# Altium PCB PCB_Project_SFS_Button.PcbDoc
Units mm, origin at the board's own origin, x right, y up, seen from the top; angles counter-clockwise.
Board outline 13.5 x 13.5 mm, 4 copper layers (Top Layer, Ground Plane, Power Plane, Bottom Layer), stack 0.761 mm thick; 5 components, 3 nets, 16 pads, 11 vias.
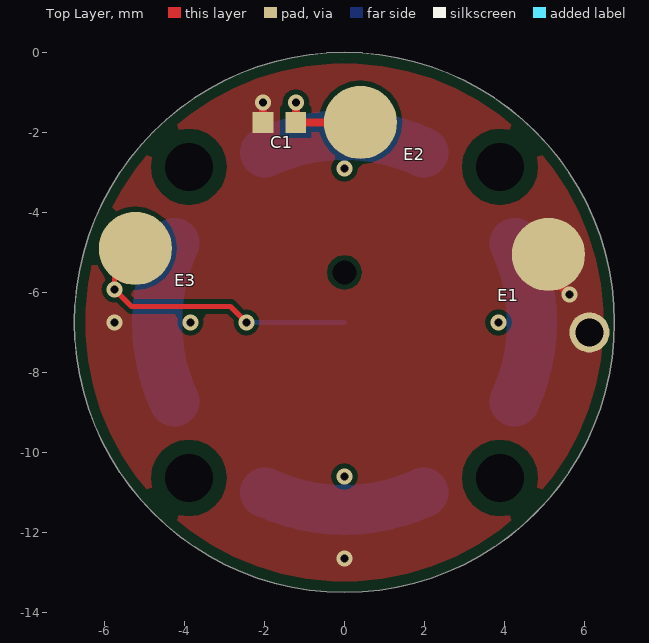
[diagram p0: Top Layer view]
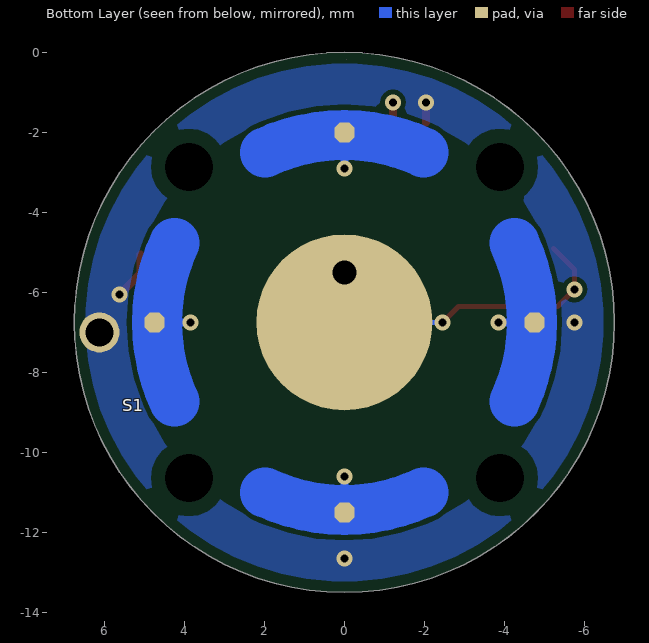
[diagram p1: Bottom Layer view, seen from below]
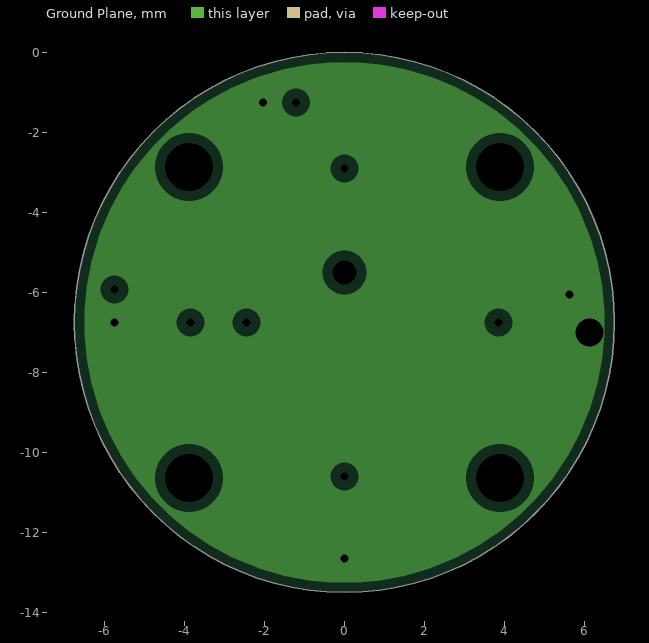
[diagram p2: Ground Plane, clearances drawn from the general rule]
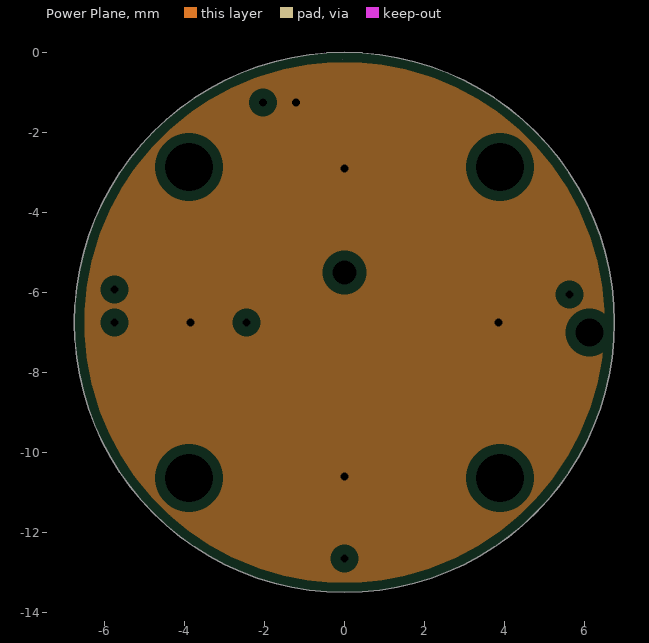
[diagram p3: Power Plane, clearances drawn from the general rule]

## Layer stack, top to bottom
Top Solder: solder mask 0.033, Solder Resist, Dk 3.5
Top Layer: signal copper 0.0411
Dielectric 1: prepreg 0.1295, Prepreg 2116, Dk 4.2
Ground Plane: plane copper 0.035, net GND
Dielectric 3: core 0.35, Core FR4, Dk 4.2
Power Plane: plane copper 0.035, net VBATT
Dielectric 2: prepreg 0.1295, Prepreg 2116, Dk 4.2
Bottom Layer: signal copper 0.0411
Bottom Solder: solder mask 0.033, Solder Resist, Dk 3.5

## Board outline
-6.75,-6.75 ccw(c0,-6.75) 0,-13.5 ccw(c0,-6.75) 6.75,-6.75 ccw(c0,-6.75) 0,0 ccw(c0,-6.75)
cut-out: -0.5,0
cut-out: -0.05,-0.175

## Design rules (kind name [scope] priority, off if disabled: settings)
BoardOutlineClearance [All] p1: gap=0.25 ignorepadtopadclearanceinfootprint=FALSE except(0: Arc-SplitContinuation Track-SplitContinuation SMDPad-SplitContinuation THPad-SplitContinuation Via-SplitContinuation Fill-SplitContinuation Poly-SplitContinuation Region-SplitContinuation Text-SplitContinuation)
Clearance NPTHClearance [IsThruPin and not PadIsPlated] p1: gap=0.35 ignorepadtopadclearanceinfootprint=FALSE except(0: Arc-Hole Track-Hole SMDPad-Hole THPad-Hole Via-Hole Fill-Hole Poly-Hole Region-Hole Text-Hole)
Clearance LowClearance [All] p2 off: gap=0.1 ignorepadtopadclearanceinfootprint=FALSE except(0: Arc-Hole Track-Hole SMDPad-Hole THPad-Hole Via-Hole Fill-Hole Poly-Hole Region-Hole Text-Hole)
Clearance StandardClearance [All] p3: gap=0.125 ignorepadtopadclearanceinfootprint=FALSE except(0: Arc-Hole Track-Hole SMDPad-Hole THPad-Hole Via-Hole Fill-Hole Poly-Hole Region-Hole Text-Hole)
Clearance HighClearance [All] p4 off: gap=0.25 ignorepadtopadclearanceinfootprint=FALSE except(0: Arc-Hole Track-Hole SMDPad-Hole THPad-Hole Via-Hole Fill-Hole Poly-Hole Region-Hole Text-Hole)
ComponentClearance [All] p1: gap=0 collisioncheckmode=3 verticalgap=2540 showdistances=FALSE
DiffPairsRouting [All] p1: maxlimit=1 minlimit=0.1 mostfreqgap=0.125 toplayer_minwidth=0.1 toplayer_maxwidth=1 toplayer_prefwidth=0.125 bottomlayer_minwidth=0.1 bottomlayer_maxwidth=1 bottomlayer_prefwidth=0.125 maxuncoupledlength=12.7
HoleSize HoleSize-0.8mmBoard [All] p1 off: absolutevalues=TRUE maxlimit=10 minlimit=0.15 maxpercent=80.000 minpercent=20.000 // For Board Thickness <= 0.8mm, Aspect Ratio <= 6
HoleSize HoleSize-LaserDrill [All] p2 off: absolutevalues=TRUE maxlimit=10 minlimit=0.15 maxpercent=80.000 minpercent=20.000 // Minimum Hole Size for Laser Drill
HoleSize HoleSize-ConventionalDrill [All] p3: absolutevalues=TRUE maxlimit=10 minlimit=0.175 maxpercent=80.000 minpercent=20.000 // Minimum Hole Size for Conventional Drill
HoleSize HoleSize-1.5mmBoard [All] p4: absolutevalues=TRUE maxlimit=10 minlimit=0.25 maxpercent=80.000 minpercent=20.000 // For Board Thickness <= 1.5mm, Aspect Ratio <= 6
HoleToHoleClearance [All] p1: gap=0.25 allowstackedmicrovias=TRUE
MinimumAnnularRing [All] p1: minimumring=0.1
MinimumSolderMaskSliver [All] p1: minsoldermaskwidth=0.2
PlaneClearance [All] p1: clearance=0.25
PlaneConnect [All] p1: planeconnectstyle=Direct reliefexpansion=0.508 reliefentries=4 reliefconductorwidth=0.254 reliefairgap=0.254
PolygonConnect [All] p1: connectstyle=Direct reliefconductorwidth=0.254 reliefentries=4 polygonreliefangle="90 Angle" airgapwidth=0.254
RoomDefinition IDF_Placement_Keepout_1 [All vs False] p1: confinementstyle=ConfineOut formatcopy=TRUE lockcomponents=FALSE outline 3.6,-8.936 4.639,-9.975 4.673,-9.925 4.74,-9.825 4.804,-9.723 4.867,-9.62 4.897,-9.568 6.335,-10.575 6.219,-10.767 5.964,-11.136 5.688,-11.489 5.391,-11.824 5.074,-12.141 4.739,-12.438 4.386,-12.714 4.017,-12.969 3.825,-13.085 2.818,-11.647 2.87,-11.617 2.973,-11.554 3.075,-11.49 3.175,-11.423 3.225,-11.389 2.186,-10.35 0.005,-10.35 0.005,-8.85 2.1,-8.85 2.1,-4.65 0.005,-4.65 0.005,-3.15 2.186,-3.15 3.225,-2.111 3.175,-2.077 3.075,-2.01 2.974,-1.946 2.87,-1.883 2.818,-1.853 3.825,-0.415 4.017,-0.531 4.386,-0.786 4.739,-1.062 5.074,-1.359 5.391,-1.676 5.688,-2.011 5.964,-2.364 6.219,-2.733 6.335,-2.925 4.897,-3.932 4.867,-3.88 4.804,-3.777 4.74,-3.675 4.673,-3.575 4.639,-3.525 3.6,-4.564
RoomDefinition IDF_Placement_Keepout [All vs False] p2: confinementstyle=ConfineOut formatcopy=TRUE lockcomponents=FALSE outline -3.6,-8.936 -3.6,-4.564 -4.639,-3.525 -4.673,-3.575 -4.74,-3.675 -4.804,-3.777 -4.867,-3.88 -4.897,-3.932 -6.335,-2.925 -6.219,-2.733 -5.964,-2.364 -5.688,-2.011 -5.391,-1.676 -5.074,-1.359 -4.739,-1.062 -4.386,-0.786 -4.017,-0.531 -3.825,-0.415 -2.818,-1.853 -2.87,-1.883 -2.973,-1.946 -3.075,-2.01 -3.175,-2.077 -3.225,-2.111 -2.186,-3.15 -0.005,-3.15 -0.005,-4.65 -2.1,-4.65 -2.1,-8.85 -0.005,-8.85 -0.005,-10.35 -2.186,-10.35 -3.225,-11.389 -3.175,-11.423 -3.075,-11.49 -2.973,-11.554 -2.87,-11.617 -2.818,-11.647 -3.825,-13.085 -4.017,-12.969 -4.386,-12.714 -4.739,-12.438 -5.074,-12.141 -5.391,-11.824 -5.688,-11.489 -5.964,-11.136 -6.219,-10.767 -6.335,-10.575 -4.897,-9.568 -4.867,-9.62 -4.804,-9.723 -4.74,-9.825 -4.673,-9.925 -4.639,-9.975
RoutingVias [All] p1: holewidth=0.711 width=1.27 viastyle="Through Hole" minholewidth=0.711 minwidth=1.27 maxholewidth=0.711 maxwidth=1.27
SilkToSilkClearance [All] p1: silktosilkclearance=0.1
SilkToSolderMaskClearance [IsPad] p1: minsilkscreentomaskgap=0.3 clearancetoexposedcopper=TRUE
SolderMaskExpansion [All] p1: expansion=0.1
Width [All] p1: maxlimit=10 minlimit=0.1 preferedwidth=0.125 minimp=50.000000 maximp=50.000000 favimp=50.000000 checkconnectedcopper=TRUE
21 further rules are at their usual default settings.

## Classes and differential pairs
net class Power: GND VBATT

## Components (designator, comment, footprint, x,y, rotation, side; value= is the part's Value field where it differs from the comment)
C1 "" C-IPCG-0402-H -1.625,-1.75 r0 top value=10µF
E1 "Mill-Max 806-22-001-30-0XX191" POGO-1_83MMDIA-SMD 5.1,-5.05 r0 top locked
E2 "Mill-Max 806-22-001-30-0XX191" POGO-1_83MMDIA-SMD 0.4,-1.75 r0 top locked
E3 "Mill-Max 806-22-001-30-0XX191" POGO-1_83MMDIA-SMD -5.225,-4.9 r0 top
S1 "900 gF V2" DOME_10MM_Actual4LEG 0,-6.75 r180 bottom

## Footprints (in the part's own frame and the unit in brackets; to place one, negate y for a bottom-side part, rotate by r counter-clockwise, add the part's x,y. Pads: shape width x height; smd on the part's side, far side on the other; paste and mask are expansions set on the pad)
C-IPCG-0402-H [mm] "Chip Capacitor, 2-Leads, Body 1.00x0.50mm, IPC High Density"
  rect 0.52x0.52 smd: 1(-0.41,0) 2(0.41,0)
  body extent -0.53,-0.28 0.53,0.28, height 0.7
DOME_10MM_Actual4LEG [mm] "Four-legged 10mm Snap Dome Segmented"
  oct 0.5x0.5 smd paste-20: 1(-4.75,0) 1(0,-4.75) 1(0,4.75) 1(4.75,0)
  round 4.4 smd paste-20 mask+0.25: 2(0,0)
  round 0 hole 0.6: ""(0,1.25)
  Top Layer pour cut-out: 0,-5.4 -2.066,-4.989 -3.818,-3.818 -4.989,-2.067 -5.4,0 -5.4,0 -4.677,2.7 -2.7,4.676 0,5.4 0,5.4 2.066,4.989 3.818,3.818 4.989,2.066 5.4,0 5.4,0 4.989,-2.067 3.818,-3.818 2.066,-4.989 0,-5.4
  Top Layer region: -3.8,1.383
  Top Layer region: -4.4,1.601
  Top Layer lines w1.25: 4.248,-1.981 ccw(c0,0) 4.687,0 ccw(c0,0) 4.248,1.981 ; 1.981,-4.248 cw(c0,0) 0,-4.687 cw(c0,0) -1.981,-4.248 ; 1.981,4.248 ccw(c0,0) 0,4.687 ccw(c0,0) -1.981,4.248 ; -4.248,-1.981 cw(c0,0) -4.687,0 cw(c0,0) -4.248,1.981
  body extent -6.28,-6.28 6.28,6.28, height 0.01
POGO-1_83MMDIA-SMD [mm] "Surface mount spring-loaded pogo pin"
  round 1.83 smd: 1(0,0)

## Part data
C1: library part CMP-C00021,2, "CAP CER 10UF 6.3V 20% X5R 0402", Package="0402 (1005 Metric)", Temperature Coefficient=X5R, Tolerance=20%, Voltage Rating=6.3V, Height=0mm
E1 E2 E3: library part CMP-P00053,1, "806 Spring-loaded Pin 3.48mm", Mounting Type=SMD, Pin Pitch=N/A, Position Number=1
S1: library part CMP-S00016,4, "Four-legged Snap Dome Switch 10mm", Contact Rating=50mA, Circuit=SPST, Positions=1, Type=NO

## Free pads (board coordinates)
  round 1 hole 0.7 unplated: 1(6.125,-7)
  round 0 hole 1.2 unplated: MTG(-3.889,-10.639) MTG(-3.889,-2.861) MTG(3.889,-10.639) MTG(3.889,-2.861)

## Via types
v1: diameter 0.4, hole 0.2, Top Layer to Bottom Layer, 11 vias

## Nets (pads, with @x,y where several pads share a name; then routed paths per layer and width w, separated by ;. In a path a pad name is that pad's centre, name@x,y a point inside that pad or via, vN(x,y) a via of type N, cw(c..) or ccw(c..) an arc to the next point about the centre after c; other vN are vias at no path point)
GND: C1.1 E1.1 pad.1 | length 1.7
  Top Layer w0.2: C1.1 v1(-2.035,-1.25) ; E1.1 5.1,-5.525 v1(5.625,-6.05)
  other v1: 0,-12.65 -5.75,-6.75
SHIFT_BTN_2: E3.1 S1.2 | length 7.3
  Top Layer w0.125: E3.1 -5.75,-5.425 v1(-5.75,-5.925) -5.325,-6.35 -2.85,-6.35 v1(-2.45,-6.75)
  Bottom Layer w0.125: v1(-2.45,-6.75) S1.2
VBATT: C1.2 E2.1 S1.1 | length 5.5
  Top Layer w0.2: C1.2 v1(-1.215,-1.25) ; C1.2@-0.965,-1.75 E2.1
  Bottom Layer w0.125: S1.1@-4.75,-6.75 S1.1@-4.687,-6.75 ; S1.1@0,-11.5 S1.1@0,-11.437 ; S1.1@0,-2.063 S1.1@0,-2 ; S1.1@4.687,-6.75 S1.1@4.75,-6.75
  Bottom Layer w0.2: S1.1@-4.687,-6.75 v1(-3.85,-6.75) ; S1.1@0,-11.437 v1(0,-10.6) ; v1(0,-2.9) S1.1@0,-2.063 ; v1(3.85,-6.75) S1.1@4.687,-6.75
pads on no net: S1.

## Polygon pours and split planes (outlines as drawn)
GND on Top Layer "Top Layer-GND" (solid, remove dead copper, pour order 7): -5.555,-10.08 -5.855,-9.519 -6.098,-8.932 -6.283,-8.324 -6.407,-7.7 -6.469,-7.068 -6.469,-6.432 -6.407,-5.8 -6.283,-5.176 -6.098,-4.568 -5.855,-3.981 -5.555,-3.42 -5.202,-2.892 -4.799,-2.4 -4.35,-1.951 -3.858,-1.548 -3.33,-1.195 -2.769,-0.895 -2.182,-0.652 -1.574,-0.467 -0.95,-0.343 -0.318,-0.281 0.318,-0.281 0.95,-0.343 1.574,-0.467 2.182,-0.652 2.769,-0.895 3.33,-1.195 3.858,-1.548 4.35,-1.951 4.799,-2.4 5.202,-2.892 5.555,-3.42 5.855,-3.981 6.098,-4.568 6.283,-5.176 6.407,-5.8 6.469,-6.432 6.469,-7.068 6.407,-7.7 6.283,-8.324 6.098,-8.932 5.855,-9.519 5.555,-10.08 5.202,-10.608 4.799,-11.1 4.35,-11.549 3.858,-11.952 3.33,-12.305 2.769,-12.605 2.182,-12.848 1.574,-13.033 0.95,-13.157 0.318,-13.219 -0.318,-13.219 -0.95,-13.157 -1.574,-13.033 -2.182,-12.848 -2.769,-12.605 -3.33,-12.305 -3.858,-11.952 -4.35,-11.549 -4.799,-11.1 -5.202,-10.608
GND on Bottom Layer "Bottom Layer-GND" (solid, remove dead copper, pour order 13): -5.555,-10.08 -5.855,-9.519 -6.098,-8.932 -6.283,-8.324 -6.407,-7.7 -6.469,-7.068 -6.469,-6.432 -6.407,-5.8 -6.283,-5.176 -6.098,-4.568 -5.855,-3.981 -5.555,-3.42 -5.202,-2.892 -4.799,-2.4 -4.35,-1.951 -3.858,-1.548 -3.33,-1.195 -2.769,-0.895 -2.182,-0.652 -1.574,-0.467 -0.95,-0.343 -0.318,-0.281 0.318,-0.281 0.95,-0.343 1.574,-0.467 2.182,-0.652 2.769,-0.895 3.33,-1.195 3.858,-1.548 4.35,-1.951 4.799,-2.4 5.202,-2.892 5.555,-3.42 5.855,-3.981 6.098,-4.568 6.283,-5.176 6.407,-5.8 6.469,-6.432 6.469,-7.068 6.407,-7.7 6.283,-8.324 6.098,-8.932 5.855,-9.519 5.555,-10.08 5.202,-10.608 4.799,-11.1 4.35,-11.549 3.858,-11.952 3.33,-12.305 2.769,-12.605 2.182,-12.848 1.574,-13.033 0.95,-13.157 0.318,-13.219 -0.318,-13.219 -0.95,-13.157 -1.574,-13.033 -2.182,-12.848 -2.769,-12.605 -3.33,-12.305 -3.858,-11.952 -4.35,-11.549 -4.799,-11.1 -5.202,-10.608
GND on Ground Plane (split plane): 0.955,-0.315 1.581,-0.439 2.192,-0.625 2.782,-0.869 3.345,-1.17 3.875,-1.525 4.369,-1.93 4.82,-2.381 5.225,-2.875 5.58,-3.405 5.881,-3.968 6.125,-4.558 6.311,-5.169 6.435,-5.795 6.498,-6.431 6.498,-6.75 6.498,-7.069 6.435,-7.705 6.311,-8.331 6.125,-8.942 5.881,-9.532 5.58,-10.095 5.225,-10.625 4.82,-11.119 4.369,-11.57 3.875,-11.975 3.345,-12.33 2.782,-12.631 2.192,-12.875 1.581,-13.061 0.955,-13.185 0.319,-13.248 -0.319,-13.248 -0.955,-13.185 -1.581,-13.061 -2.192,-12.875 -2.782,-12.631 -3.345,-12.33 -3.875,-11.975 -4.369,-11.57 -4.82,-11.119 -5.225,-10.625 -5.58,-10.095 -5.881,-9.532 -6.125,-8.942 -6.311,-8.331 -6.435,-7.705 -6.498,-7.069 -6.498,-6.75 -6.498,-6.431 -6.435,-5.795 -6.311,-5.169 -6.125,-4.558 -5.881,-3.968 -5.58,-3.405 -5.225,-2.875 -4.82,-2.381 -4.369,-1.93 -3.875,-1.525 -3.345,-1.17 -2.782,-0.869 -2.192,-0.625 -1.581,-0.439 -0.955,-0.315 -0.319,-0.252 0.319,-0.252
VBATT on Power Plane (split plane): 0.955,-0.315 1.581,-0.439 2.192,-0.625 2.782,-0.869 3.345,-1.17 3.875,-1.525 4.369,-1.93 4.82,-2.381 5.225,-2.875 5.58,-3.405 5.881,-3.968 6.125,-4.558 6.311,-5.169 6.435,-5.795 6.498,-6.431 6.498,-6.75 6.498,-7.069 6.435,-7.705 6.311,-8.331 6.125,-8.942 5.881,-9.532 5.58,-10.095 5.225,-10.625 4.82,-11.119 4.369,-11.57 3.875,-11.975 3.345,-12.33 2.782,-12.631 2.192,-12.875 1.581,-13.061 0.955,-13.185 0.319,-13.248 -0.319,-13.248 -0.955,-13.185 -1.581,-13.061 -2.192,-12.875 -2.782,-12.631 -3.345,-12.33 -3.875,-11.975 -4.369,-11.57 -4.82,-11.119 -5.225,-10.625 -5.58,-10.095 -5.881,-9.532 -6.125,-8.942 -6.311,-8.331 -6.435,-7.705 -6.498,-7.069 -6.498,-6.75 -6.498,-6.431 -6.435,-5.795 -6.311,-5.169 -6.125,-4.558 -5.881,-3.968 -5.58,-3.405 -5.225,-2.875 -4.82,-2.381 -4.369,-1.93 -3.875,-1.525 -3.345,-1.17 -2.782,-0.869 -2.192,-0.625 -1.581,-0.439 -0.955,-0.315 -0.319,-0.252 0.319,-0.252

## Silkscreen, mask and mechanical layers (free items; w line width, h text height)
Rigid Cutout:
  circle w0.1: c0,-6.75 r6.75